# Altium PCB TC_TP2_EJ6.PcbDoc
Units mm, origin at the board's own origin, x right, y up, seen from the top; angles counter-clockwise.
Board outline 50 x 50 mm, 2 copper layers (Top Layer, Bottom Layer); 17 components, 13 nets, 51 pads, 0 vias.
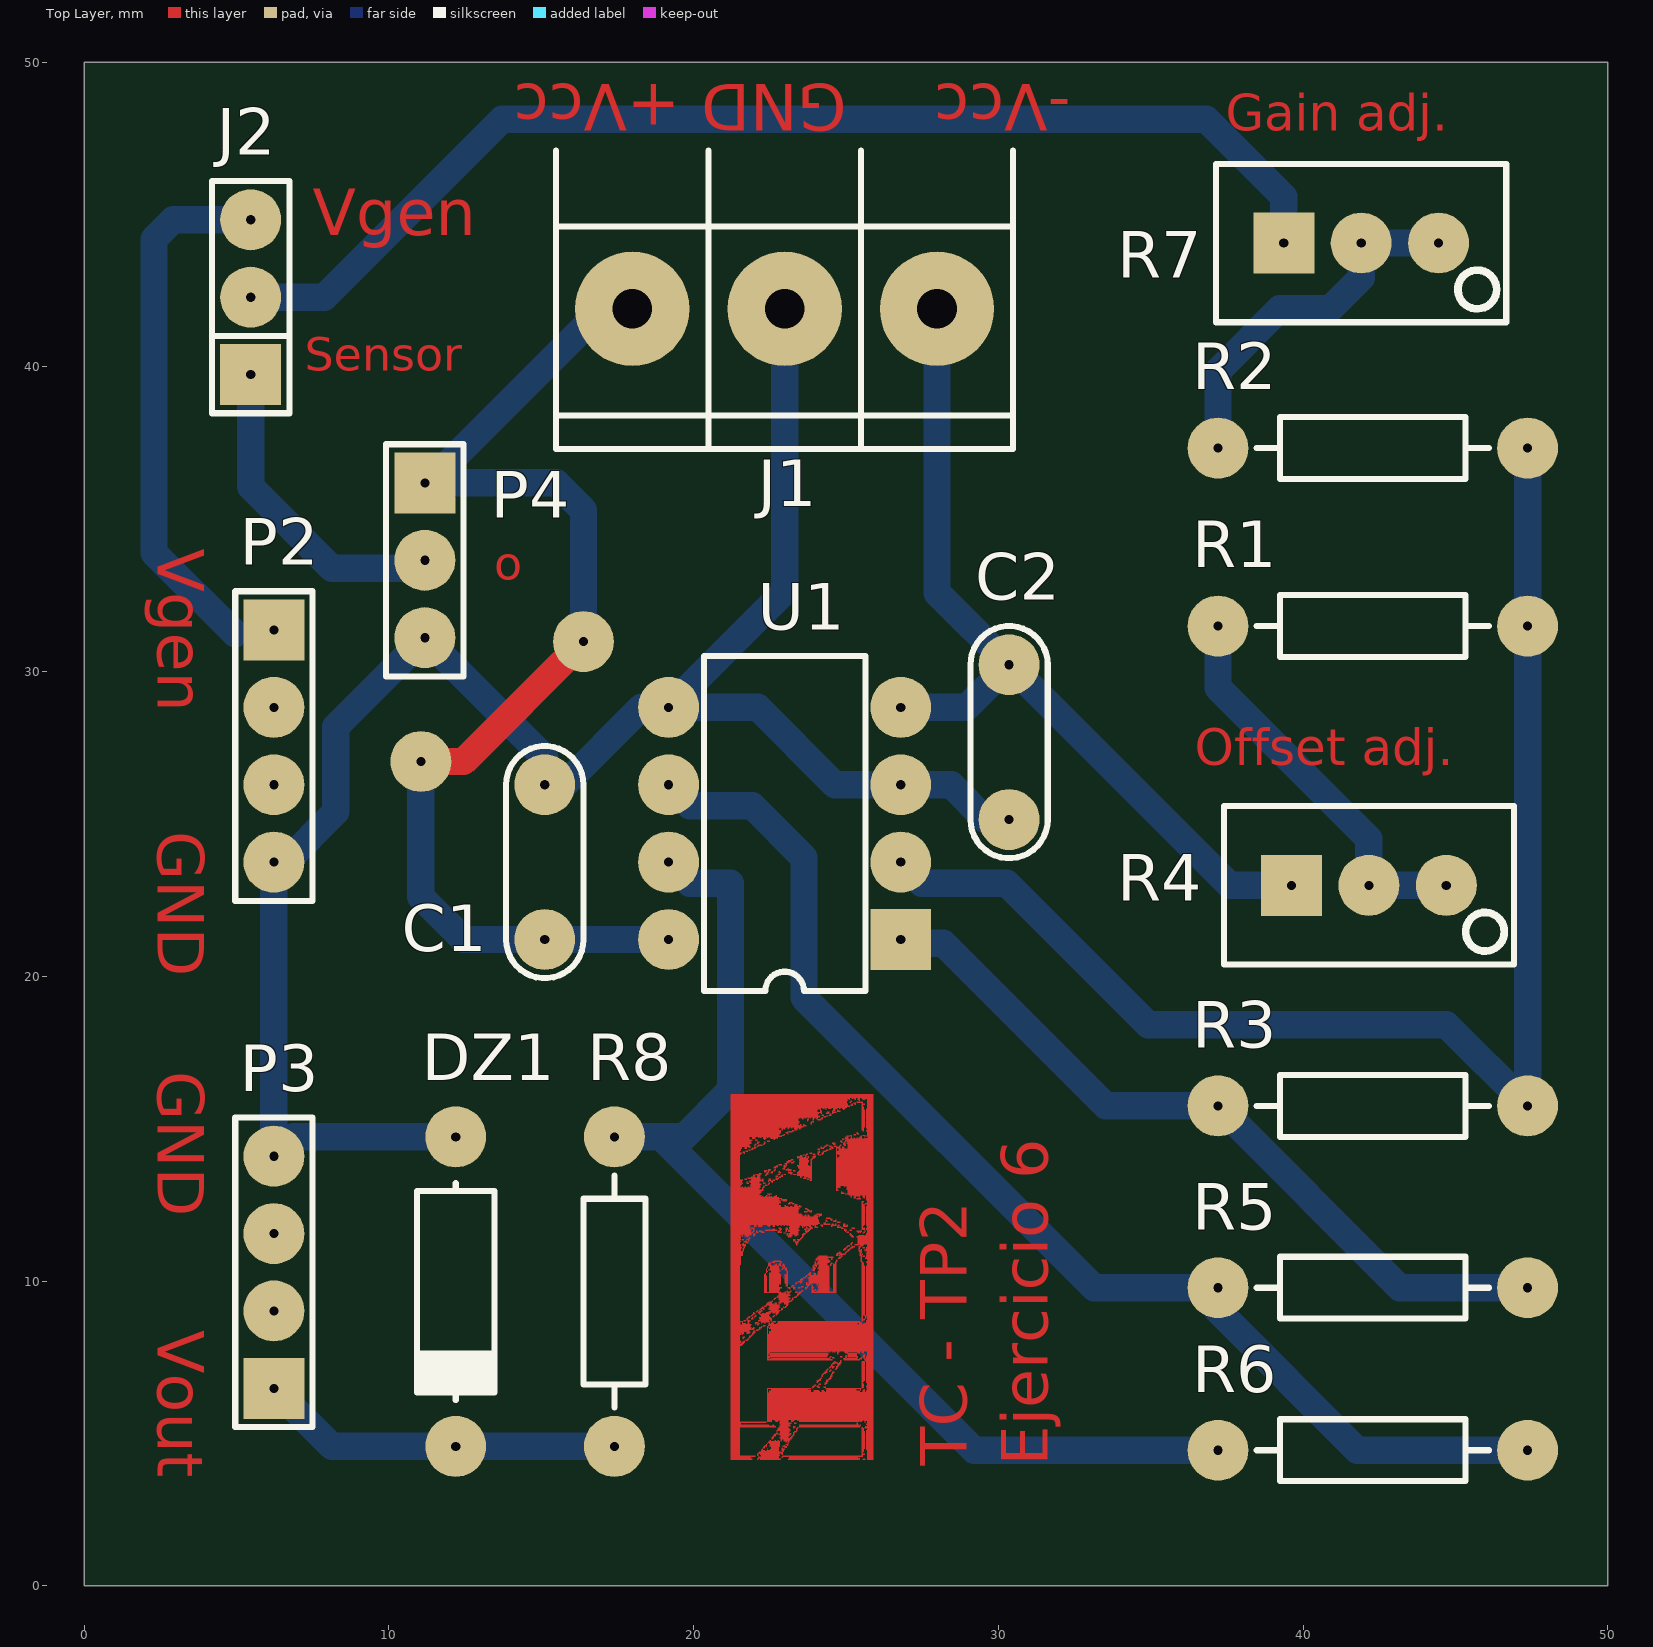
[diagram p0: Top Layer view]
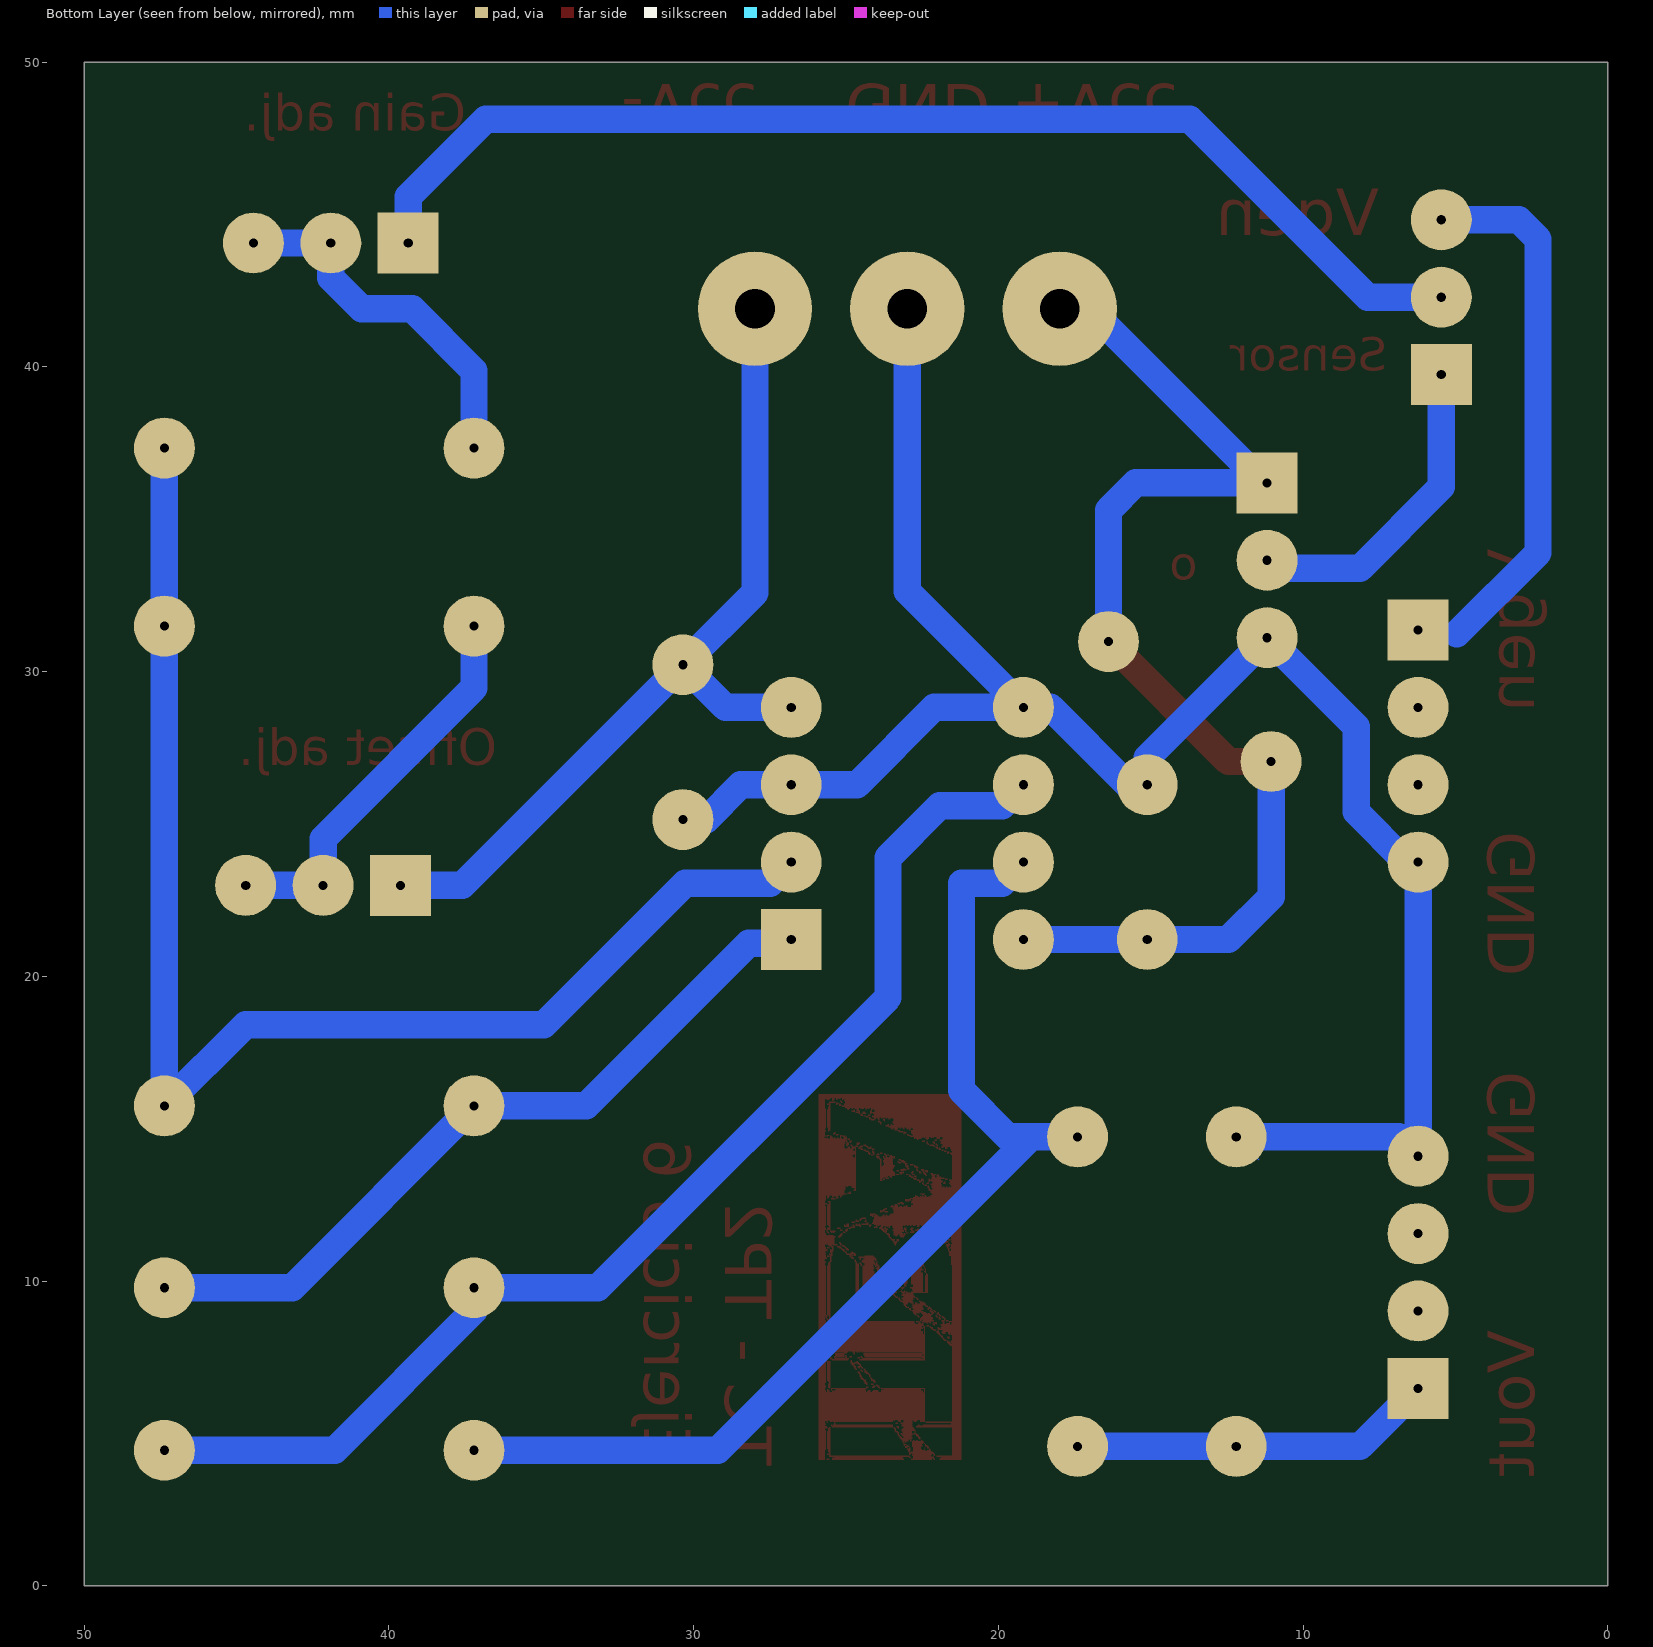
[diagram p1: Bottom Layer view, seen from below]
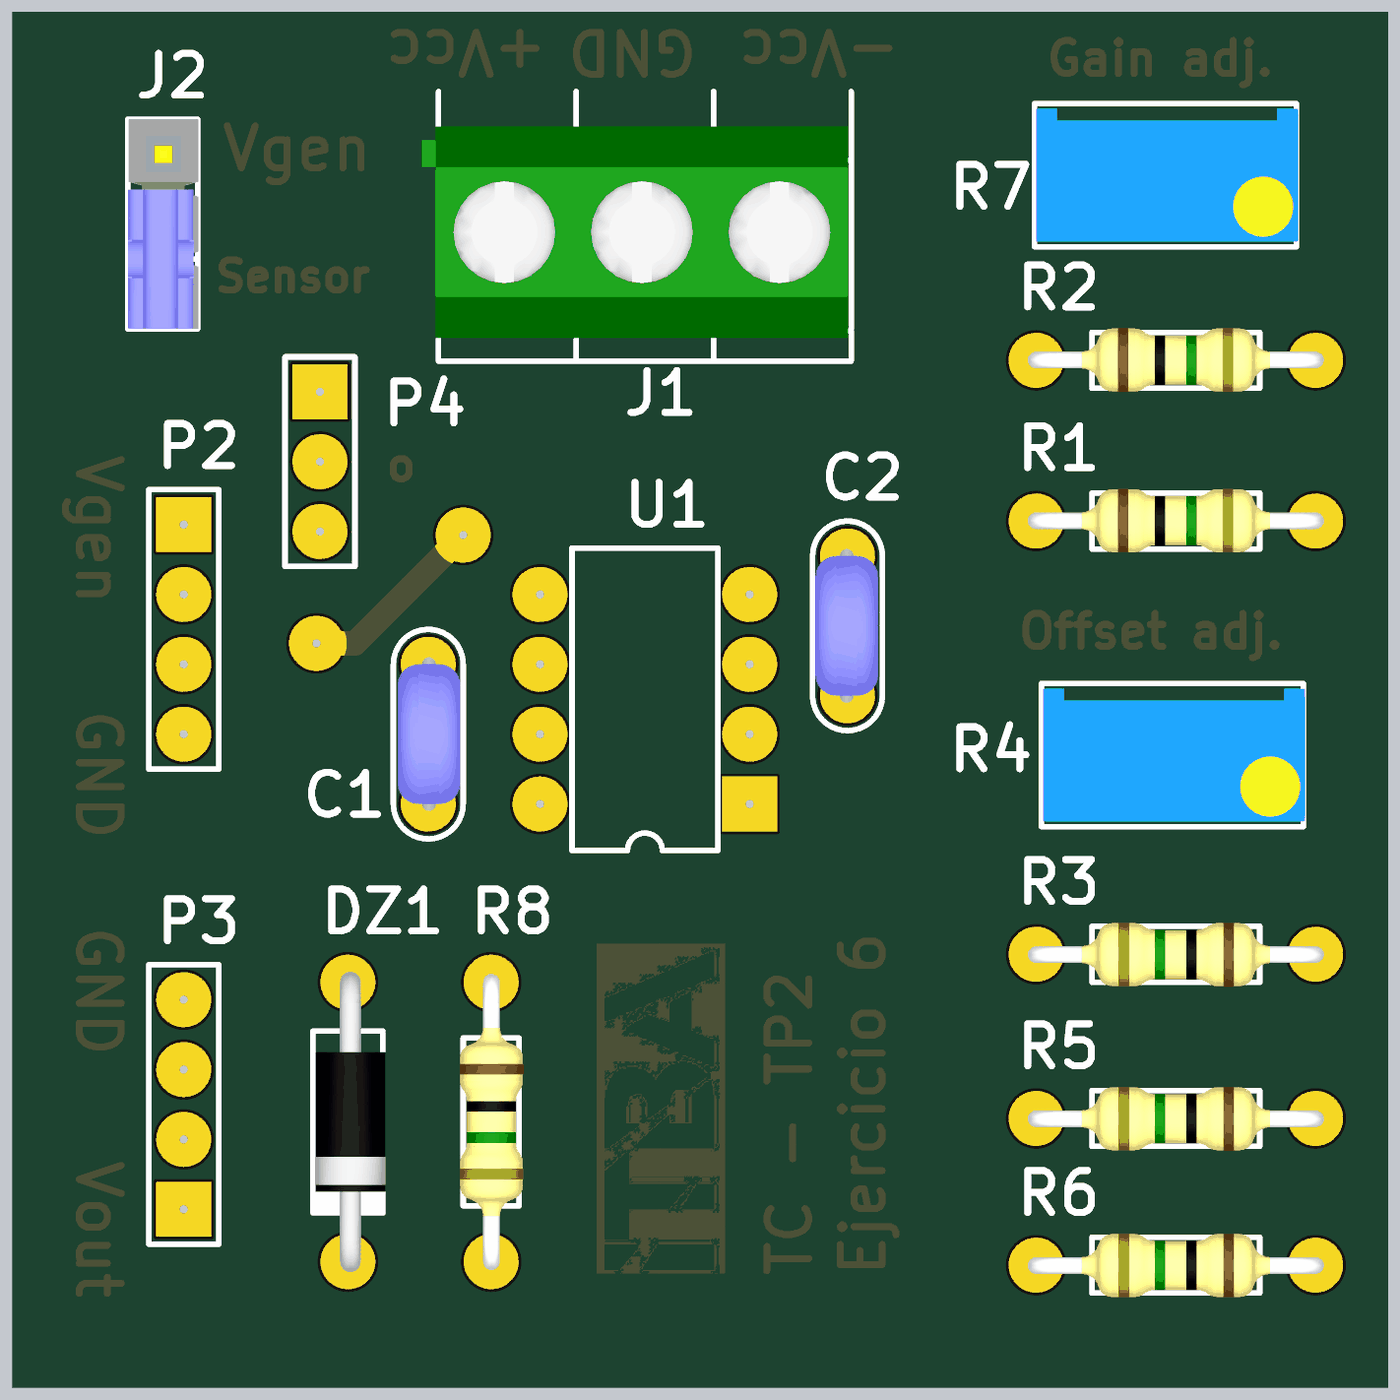
[diagram p2: 3D render of the assembled board from above, using the file's embedded part models]

## Layer stack, top to bottom
Top Solder: solder mask 0.0102, Solder Resist, Dk 3.5
Top Layer: signal copper 0.0356
Dielectric 1: dielectric 0.32, FR-4, Dk 4.8
Bottom Layer: signal copper 0.0356
Bottom Solder: solder mask 0.0102, Solder Resist, Dk 3.5

## Board outline
0,0 0,50 50,50 50,0

## Design rules (kind name [scope] priority, off if disabled: settings)
Clearance [All] p1: gap=0.25 ignorepadtopadclearanceinfootprint=FALSE
PolygonConnect [All] p1: connectstyle=Relief reliefconductorwidth=0.254 reliefentries=4 polygonreliefangle="90 Angle" airgapwidth=0.254
RoutingVias [All] p1: holewidth=0.711 width=1.27 viastyle="Through Hole" minholewidth=0.711 minwidth=1.27 maxholewidth=0.711 maxwidth=1.27
SolderMaskExpansion [All] p1: expansion=0.102
Width [All] p1: maxlimit=0.9 minlimit=0.5 preferedwidth=0.9
30 further rules are at their usual default settings.

## Components (designator, comment, footprint, x,y, rotation, side; value= is the part's Value field where it differs from the comment)
C1 "100nF" CAP200 15.113,23.749 r90 top
C2 "100nF" CAP200 30.353,27.686 r270 top
DZ1 "DIODO ZENER" DO41 12.192,9.652 r270 top
J1 "BORNERA 3" BORNERA3 22.987,41.91 r90 top
J2 "JUMPER" JUMPER3 5.461,42.291 r90 top
P2 "Header 4" HDR1X4 6.223,31.369 r270 top
P3 "Header 4" HDR1X4 6.223,6.477 r90 top
P4 "Header 3" HDR1X3 11.176,36.195 r270 top
R1 "220k" RES400 37.211,31.496 r0 top
R2 "4.7k" RES400 37.211,37.338 r0 top
R3 "270k" RES400 47.371,15.748 r180 top
R4 "50k" "PRESET V" 42.164,22.987 r0 top
R5 "4.7k" RES400 47.371,9.779 r180 top
R6 "4.7k" RES400 47.371,4.445 r180 top
R7 "2k" "PRESET V" 41.91,44.069 r0 top
R8 "calcular" RES400 17.399,14.732 r270 top
U1 "TL072P" P008 22.987,25.019 r90 top

## Footprints (in the part's own frame and the unit in brackets; to place one, negate y for a bottom-side part, rotate by r counter-clockwise, add the part's x,y. Pads: shape width x height; smd on the part's side, far side on the other; paste and mask are expansions set on the pad)
BORNERA3 [mm] "Bornera con Tornillos 5mm separación"
  round 3.75 hole 1.3: 1(0,5) 2(0,0) 3(0,-5)
  silkscreen extent -4.6,-7.5 5.2,7.5, body extent -3.76,-7.39 3.94,8.11, height 10.05
CAP200 [mm]
  round 2 hole 0.3: 1(-2.54,0) 2(2.54,0)
  silkscreen extent -3.81,-1.27 3.81,1.27, body extent -2.79,-1.17 2.79,1.12, height 6.24
DO41 [mm]
  round 2 hole 0.3: 1(-5.08,0) 2(5.08,0)
  silkscreen extent -3.56,-1.27 3.56,1.27, body extent -5.46,-1.19 5.46,1.37, height 2.03
HDR1X3 [mm] "Connector; Header; 3 Position"
  rect 2x2 hole 0.3: 1(0,0)
  round 2 hole 0.3: 2(2.54,0) 3(5.08,0)
  silkscreen extent -1.27,-1.27 6.35,1.27
HDR1X4 [mm] "Connector; Header; 4 Position"
  rect 2x2 hole 0.3: 1(0,0)
  round 2 hole 0.3: 2(2.54,0) 3(5.08,0) 4(7.62,0)
  silkscreen extent -1.27,-1.27 8.89,1.27
JUMPER3 [mm]
  rect 2x2 hole 0.3: 1(-2.54,0)
  round 2 hole 0.3: 2(0,0) 3(2.54,0)
  silkscreen extent -3.81,-1.27 3.81,1.27, body extent -3.81,-1.3 3.81,1.27, height 16.15
P008 [mm] "DIP; 8 Leads; Row Spacing 7.62 mm; Pitch 2.54 mm"
  rect 2x2 hole 0.3: 1(-3.81,-3.81)
  round 2 hole 0.3: 2(-1.27,-3.81) 3(1.27,-3.81) 4(3.81,-3.81) 5(3.81,3.81) 6(1.27,3.81) 7(-1.27,3.81) 8(-3.81,3.81)
  silkscreen extent -5.5,-2.65 5.5,2.65
"PRESET V" [mm]
  rect 2x2 hole 0.3: 1(-2.54,0)
  round 2 hole 0.3: 2(0,0) 3(2.54,0)
  silkscreen extent -4.76,-2.6 4.76,2.6, body extent -4.7,-2.42 4.83,2.42, height 11.55
RES400 [mm]
  round 2 hole 0.3: 1(0,0) 2(10.16,0)
  silkscreen extent 1.27,-1.02 8.89,1.02, body extent -0.3,-1.14 10.46,1.17, height 2.43

## Part data
C1 C2: library part CAP
J2: library part JUMPER3
P2 P3: "Header, 4-Pin", LatestRevisionDate=17-Jul-2002, LatestRevisionNote="Re-released for DXP Platform.", Publisher="Altium Limited"
P4: "Header, 3-Pin", LatestRevisionDate=17-Jul-2002, LatestRevisionNote="Re-released for DXP Platform.", Publisher="Altium Limited"
R1 R2 R3 R5 R6 R8: library part RES
R4 R7: library part PRESET
U1: "Low-Noise JFET-Input Operational Amplifier", Code_JEDEC=MO-001-AN, ComponentLink1Description="Manufacturer Link", ComponentLink1URL=http://www.ti.com/, ComponentLink2Description=Datasheet, ComponentLink2URL=http://www-s.ti.com/sc/ds/tl072.pdf, DatasheetVersion=Aug-1996, LatestRevisionDate=04-Mar-2005, LatestRevisionNote="Stylized 3D Model Added.", PackageDescription="DIP; 8 Leads; Row Spacing 7.62 mm; Pitch 2.54 mm", PackageReference=P008, PackageVersion=Jun-1999, Published=16-Jan-2001, Publisher="Altium Limited"

## Free pads (board coordinates)
  round 2 hole 0.3: 24(11.049,27.051) 24(16.383,30.988)

## Nets (pads, with @x,y where several pads share a name; then routed paths per layer and width w, separated by ;. In a path a pad name is that pad's centre, name@x,y a point inside that pad or via, vN(x,y) a via of type N, cw(c..) or ccw(c..) an arc to the next point about the centre after c; other vN are vias at no path point)
+Vcc: C1.1 J1.1 P4.1 pad.24 U1.8 | length 39.2
  Top Layer w0.9: pad.24@11.049,27.051 12.446,27.051 pad.24@16.383,30.988
  Bottom Layer w0.9: pad.24@11.049,27.051 11.049,22.606 12.446,21.209 C1.1 U1.8 ; P4.1@11.176,36.068 P4.1@11.303,36.195 ; P4.1 P4.1@11.303,36.195 ; pad.24@16.383,30.988 16.383,35.306 15.494,36.195 P4.1@11.303,36.195 ; J1.1 17.018,41.91 P4.1@11.303,36.195
-Vcc: C2.1 J1.3 R4.1 U1.4 | length 29.1
  Bottom Layer w0.9: U1.4 28.956,28.829 C2.1 ; J1.3 27.987,32.592 C2.1 ; R4.1 37.592,22.987 C2.1
GND: C1.2 C2.2 DZ1.1 J1.2 P2.4 P3.4 P4.3 U1.3 U1.5 | length 65.5
  Bottom Layer w0: 11.43,13.97 DZ1.1
  Bottom Layer w0.9: DZ1.1 6.858,14.732 P3.4 P2.4 6.604,23.749 8.255,25.4 8.255,28.194 P4.3 15.113,27.178 C1.2 15.748,26.289 18.288,28.829 U1.5 ; J1.2 22.987,32.639 U1.5 ; C2.2 29.591,25.146 28.448,26.289 U1.3 24.638,26.289 22.098,28.829 U1.5
NetJ2_2: J2.2 R7.1 | length 38.9
  Bottom Layer w0.9: J2.2 7.874,42.291 13.716,48.133 36.83,48.133 39.37,45.593 R7.1
NetR1_1: R1.1 R4.2 R4.3 | length 13.1
  Bottom Layer w0.9: R1.1 37.211,29.464 42.164,24.511 R4.2 R4.3
NetR1_2: R1.2 R2.2 R3.1 U1.2 | length 45.5
  Bottom Layer w0.9: U1.2 27.487,23.059 30.281,23.059 34.925,18.415 44.704,18.415 R3.1 R1.2 R2.2
NetR2_1: R2.1 R7.2 R7.3 | length 12.2
  Bottom Layer w0.9: R2.1 37.211,39.878 39.243,41.91 40.894,41.91 41.91,42.926 R7.2 R7.3
NetR3_2: R3.2 R5.1 U1.1 | length 25.3
  Bottom Layer w0.9: U1.1 26.924,21.082 28.194,21.082 33.528,15.748 R3.2 43.18,9.779 R5.1
NetR5_2: R5.2 R6.1 U1.6 | length 40.4
  Bottom Layer w0.9: U1.6 19.867,25.599 21.918,25.599 23.622,23.895 23.622,19.304 33.147,9.779 R5.2 37.211,9.017 41.783,4.445 R6.1
NetR6_2: R6.2 R8.1 U1.7 | length 36.5
  Bottom Layer w0.9: R8.1 18.923,14.732 ; U1.7 19.867,23.059 21.209,23.059 21.209,16.256 19.685,14.732 18.923,14.732 ; R6.2@36.957,4.699 R6.2 29.21,4.445 18.923,14.732
Vg: J2.3 P2.1 | length 17.5
  Bottom Layer w0.9: 4.953,31.242 2.286,33.909 2.286,44.196 2.921,44.831 J2.3
Vout: DZ1.2 P3.1 R8.2 | length 12
  Bottom Layer w0.9: P3.1 8.128,4.572 DZ1.2 R8.2
Vsensor: J2.1 P4.2 | length 10.5
  Bottom Layer w0.9: J2.1 5.461,36.068 8.128,33.401 P4.2@11.176,33.401
pads on no net: P2.2 P2.3 P3.2 P3.3

## Other copper
Top Layer:
  drawing of 174 lines, arcs and shapes, not listed
  text "+Vcc" at 19.558,49.276 h1.52 r180
  text "GND" at 25.019,49.276 h1.52 r180
  text "-Vcc" at 32.385,49.276 h1.52 r180
  text "Gain adj." at 37.465,47.752 h1.2
  text "Vgen" at 7.493,44.323 h1.52
  text "Sensor" at 7.239,39.878 h1.1
  text "Vgen" at 2.413,34.036 h1.52 r270
  text "o" at 13.462,33.02 h1.1
  text "Offset adj." at 36.449,26.924 h1.2
  text "GND" at 2.413,24.765 h1.52 r270
  text "GND" at 2.413,16.891 h1.52 r270
  text "Vout" at 2.413,8.382 h1.52 r270
  text "TC - TP2" at 28.956,3.937 h1.52 r90
  text "Ejercicio 6" at 31.623,3.937 h1.52 r90

## Silkscreen, mask and mechanical layers (free items; w line width, h text height)
Mechanical 1:
  the board outline again, w0.1